# Altium PCB PCB_power_management.PcbDoc
Units mil, origin at the board's own origin, x right, y up, seen from the top; angles counter-clockwise.
Board outline 6000 x 4000 mil, 2 copper layers (Top Layer, Bottom Layer); 15 components, 11 nets, 38 pads, 0 vias.
Unrouted connection lines stored in the file: 26.
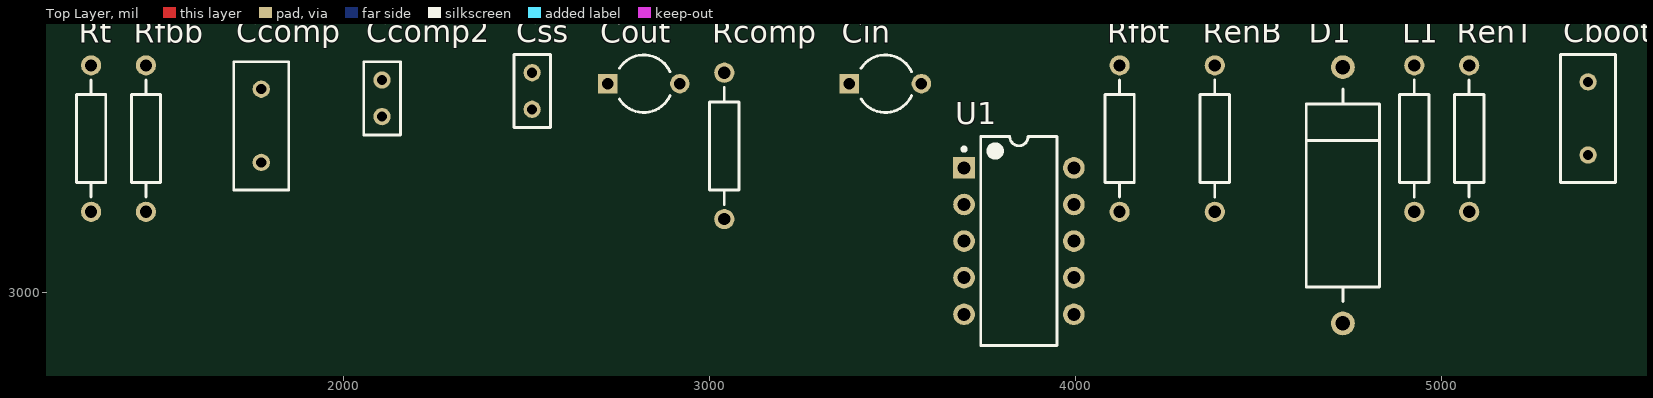
[diagram p0: Top Layer view]
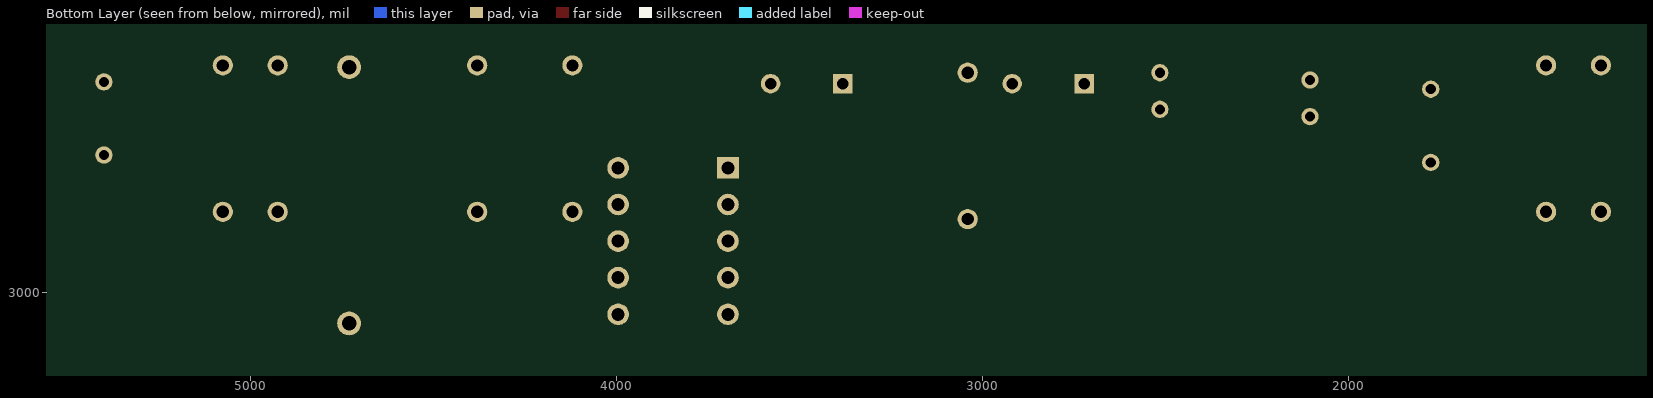
[diagram p1: Bottom Layer view, seen from below]

## Layer stack, top to bottom
Top Solder: solder mask 0.4, Solder Resist, Dk 3.5
Top Layer: signal copper 1.4
Dielectric 1: dielectric 12.6, FR-4, Dk 4.8
Bottom Layer: signal copper 1.4
Bottom Solder: solder mask 0.4, Solder Resist, Dk 3.5

## Board outline
1000,1000 7000,1000 7000,5000 1000,5000

## Design rules (kind name [scope] priority, off if disabled: settings)
Clearance [All] p1: gap=10 ignorepadtopadclearanceinfootprint=FALSE except(0: Arc-Hole Track-Hole SMDPad-Hole THPad-Hole Via-Hole Fill-Hole Poly-Hole Region-Hole Text-Hole)
PolygonConnect [All] p1: connectstyle=Relief reliefconductorwidth=10 reliefentries=4 polygonreliefangle="90 Angle" airgapwidth=10
RoomDefinition power_management [InComponentClass('power_management')] p1: confinementstyle=ConfineIn formatcopy=TRUE lockcomponents=FALSE outline 1260,2870 5610,2870 5610,3760 1260,3760
RoutingVias [All] p1: holewidth=28 width=50 viastyle="Through Hole" minholewidth=28 minwidth=50 maxholewidth=28 maxwidth=50
SolderMaskExpansion [All] p1: expansion=4
Width [All] p1: maxlimit=10 minlimit=10 preferedwidth=10
30 further rules are at their usual default settings.

## Components (designator, comment, footprint, x,y, rotation, side; value= is the part's Value field where it differs from the comment)
Cboot "GRM155R61A104KA01D" RAD-0.2 5400,3475 r90 top value=100nF
Ccomp "CC0805KRX7R9BB471" RAD-0.2 1775,3455 r90 top value=470pF
Ccomp2 "C0805C180K5GACTU" RAD-0.1 2105,3530 r90 top value=18pF
Cin "GRM188R61A225KE34D" CAPR5-4X5 3480,3570 r0 top value=2.2uF
Cout "C2012X5R1A476M125AC" CAPR5-4X5 2820,3570 r0 top value=47uF
Css "CC0805KRX7R9BB682" RAD-0.1 2515,3550 r90 top value=6.8nF
D1 "B340A-13-F" DIODE-0.7 4730,3265 r90 top value=500mV
L1 "SRN6045-3R3Y" AXIAL-0.4 4925,3420 r90 top value=3.3uH
Rcomp "RC1206FR-0756KL" AXIAL-0.4 3040,3400 r90 top value=56k
RenB "RC1206FR-0730KL" AXIAL-0.4 4380,3420 r90 top value=30k
RenT "ERJ-8ENF1103V" AXIAL-0.4 5075,3420 r90 top value=110k
Rfbb "RC1206FR-078K2L" AXIAL-0.4 1460,3420 r90 top value=8.2k
Rfbt "RC1206FR-0743KL" AXIAL-0.4 4120,3420 r90 top value=43k
Rt "CRCW1206110KFKEA" AXIAL-0.4 1310,3420 r90 top value=110k
U1 "TPS54140DGQR" N10A 3845,3140 r0 top value=N/A

## Footprints (in the part's own frame and the unit in brackets; to place one, negate y for a bottom-side part, rotate by r counter-clockwise, add the part's x,y. Pads: shape width x height; smd on the part's side, far side on the other; paste and mask are expansions set on the pad)
AXIAL-0.4 [mm] "Axial Device, Thru-Hole; 2 Leads; 0.4 in Pin Spacing"
  round 1.4 hole 0.85: 1(-5.08,0) 2(5.08,0)
  silkscreen extent -4.06,-1.02 4.06,1.02
CAPR5-4X5 [mm] "Capacitor; 2 Leads"
  rect 1.35x1.35 hole 0.8: 1(-2.5,0)
  round 1.35 hole 0.8: 2(2.5,0)
  silkscreen extent -1.69,-2 1.82,2
DIODE-0.7 [mm] "Diode, Thru-Hole; 2 Leads; 0.7 in Pin Spacing"
  round 1.65 hole 1: 1(-8.89,0) 2(8.89,0)
  silkscreen extent -7.37,-2.54 7.37,2.54
N10A [mm] "DIP; 10 Leads; Row Spacing 7.62 mm; Pitch 2.54 mm"
  rect 1.5x1.5 hole 0.9: 1(-3.81,5.08)
  round 1.5 hole 0.9: 2(-3.81,2.54) 3(-3.81,0) 4(-3.81,-2.54) 5(-3.81,-5.08) 6(3.81,-5.08) 7(3.81,-2.54) 8(3.81,0) 9(3.81,2.54) 10(3.81,5.08)
  silkscreen extent -3.93,-7.25 2.65,7.25, body extent -3.25,-7.25 3.25,7.25, height 5.08
RAD-0.1 [mm] "Radial Cap, Thru-Hole; 2 Leads; 0.1 in Pin Spacing"
  round 1.2 hole 0.7: 1(-1.27,0) 2(1.27,0)
  silkscreen extent -2.54,-1.27 2.54,1.27
RAD-0.2 [mm] "Radial Cap, Thru-Hole; 2 Leads; 0.2 in Pin Spacing"
  round 1.2 hole 0.7: 1(-2.54,0) 2(2.54,0)
  silkscreen extent -4.44,-1.91 4.44,1.91

## Part data
Cboot: "GRM155R61A104KA0", Manufacturer Name=MuRata, Manufacturer Part Number=GRM155R61A104KA01D, PackageReference=GRM155R61A104KA01D
Ccomp: "CC0805KRX7R9BB47", Manufacturer Name="Yageo America", Manufacturer Part Number=CC0805KRX7R9BB471, PackageReference=CC0805KRX7R9BB471
Ccomp2: Manufacturer Name=Kemet, Manufacturer Part Number=C0805C180K5GACTU, PackageReference=C0805C180K5GACTU
Cin: "GRM188R61A225KE3", Manufacturer Name=MuRata, Manufacturer Part Number=GRM188R61A225KE34D, PackageReference=GRM188R61A225KE34D
Cout: "C2012X5R1A476M12", Manufacturer Name=TDK, Manufacturer Part Number=C2012X5R1A476M125AC, PackageReference=C2012X5R1A476M125AC
Css: "CC0805KRX7R9BB68", Manufacturer Name="Yageo America", Manufacturer Part Number=CC0805KRX7R9BB682, PackageReference=CC0805KRX7R9BB682
D1: Manufacturer Name="Diodes Inc.", Manufacturer Part Number=B340A-13-F, PackageReference=B340A-13-F
L1: Manufacturer Name=Bourns, Manufacturer Part Number=SRN6045-3R3Y, PackageReference=SRN6045-3R3Y
Rcomp RenB Rfbb Rfbt: Manufacturer Name="Yageo America"
  Rcomp: Manufacturer Part Number=RC1206FR-0756KL, PackageReference=RC1206FR-0756KL
  RenB: Manufacturer Part Number=RC1206FR-0730KL, PackageReference=RC1206FR-0730KL
  Rfbb: Manufacturer Part Number=RC1206FR-078K2L, PackageReference=RC1206FR-078K2L
  Rfbt: Manufacturer Part Number=RC1206FR-0743KL, PackageReference=RC1206FR-0743KL
RenT: Manufacturer Name=Panasonic, Manufacturer Part Number=ERJ-8ENF1103V, PackageReference=ERJ-8ENF1103V
Rt: Manufacturer Name=Vishay-Dale, Manufacturer Part Number=CRCW1206110KFKEA, PackageReference=CRCW1206110KFKEA
U1: "TPS54160DGQR", Manufacturer Name="Texas Instruments", Manufacturer Part Number=TPS54140DGQR, PackageReference=TPS54160DGQR

## Nets (pads, with @x,y where several pads share a name; then routed paths per layer and width w, separated by ;. In a path a pad name is that pad's centre, name@x,y a point inside that pad or via, vN(x,y) a via of type N, cw(c..) or ccw(c..) an arc to the next point about the centre after c; other vN are vias at no path point)
0: Ccomp2.2 Ccomp.2 Cin.2 Cout.2 Css.2 D1.2 RenB.2 Rfbb.2 Rt.2 U1.9
NetCboot_1: Cboot.1 U1.1
NetCboot_2: Cboot.2 D1.1 L1.2 U1.10
NetCcomp2_1: Ccomp2.1 Rcomp.1 U1.8
NetCcomp_1: Ccomp.1 Rcomp.2
NetCin_1: Cin.1 RenT.1 U1.2
NetCout_1: Cout.1 L1.1 Rfbt.1
NetCss_1: Css.1 U1.4
NetRenB_1: RenB.1 RenT.2 U1.3
NetRfbb_1: Rfbb.1 Rfbt.2 U1.7
NetRt_1: Rt.1 U1.5
pads on no net: U1.6

## Silkscreen, mask and mechanical layers (free items; w line width, h text height)
Drill Drawing:
  lines w10: 2000,1970 2000,4140 4115,4140 4155,4140 4175,4140 4175,1970 2000,1970